# Altium PCB PCB_VHDCI_breakout.PCBDOC (part 2 of 3)
Units mil, origin at the board's own origin, x right, y up, seen from the top; angles counter-clockwise.
Board outline 6299 x 3937 mil, 4 copper layers (TopLayer, Internal Plane 1, Internal Plane 2, BottomLayer), stack 35.551 mil thick; 61 components, 167 nets, 639 pads, 297 vias.
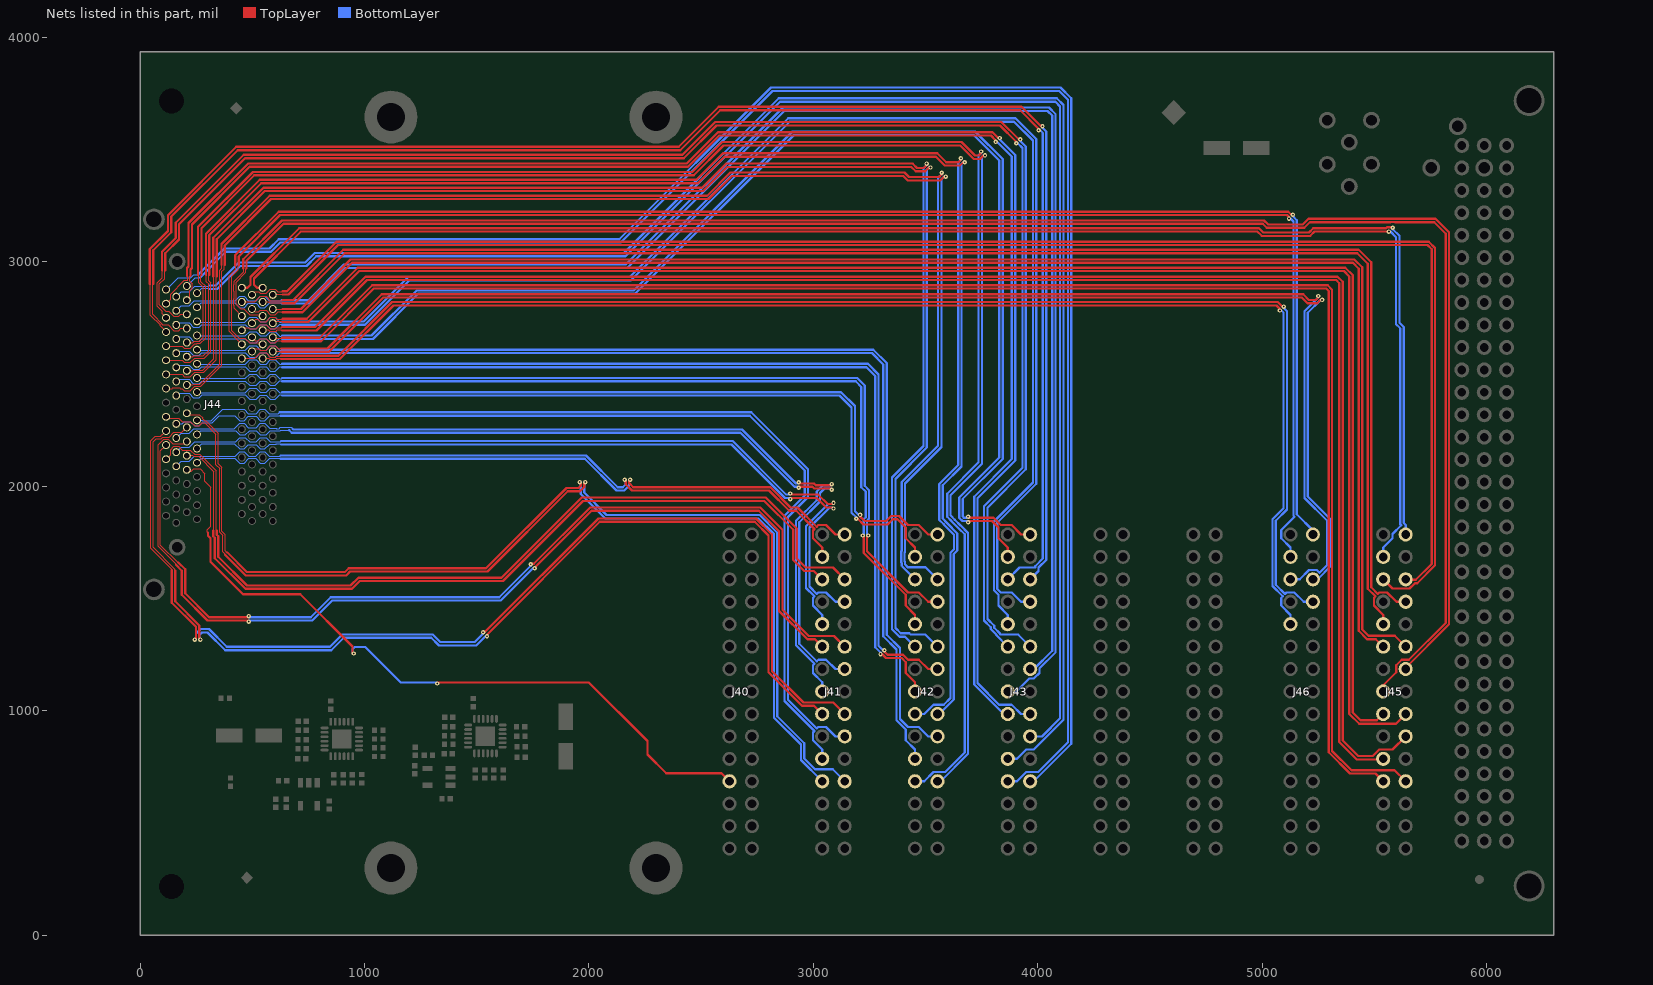
[diagram p4: the nets of this part, all layers, seen from the top]

## Via types
v1: diameter 19.68, hole 7.87, TopLayer to BottomLayer, tented both sides, 274 vias
v2: diameter 23.62, hole 11.81, TopLayer to BottomLayer, tented both sides, 23 vias

## Nets (pads, with @x,y where several pads share a name; then routed paths per layer and width w, separated by ;. In a path a pad name is that pad's centre, name@x,y a point inside that pad or via, vN(x,y) a via of type N, cw(c..) or ccw(c..) an arc to the next point about the centre after c; other vN are vias at no path point) (continued)
LVDS1_8_P: J40.23 J44.L8 | length 3326
  TopLayer w5: J44.L8@208.46,2073.66 214.74,2067.38 229.15,2067.38 239.15,2077.38 268.32,2077.38 288.95,2056.75 288.95,2023.05 315.02,1996.98 315.02,1822.29 300.02,1807.29 300.02,1796.05 302.52,1793.55
  TopLayer w10: 302.52,1793.55 302.52,1780.05 314.02,1768.55 314.02,1664.05 459.02,1519.05 714.45,1519.05 947.02,1286.48 947.02,1259.9 v1(951.87,1255.05) ; v1(1324.02,1121.21) 1328.87,1126.05 2000.02,1126.05 2261.02,865.05 2261.02,804.84 2344.81,721.05 2591.19,721.05 J40.23@2626.57,685.67
  BottomLayer w10: v1(951.87,1255.05) 947.02,1259.9 947.02,1274.05 957.02,1284.05 1004.02,1284.05 1162.02,1126.05 1319.18,1126.05 v1(1324.02,1121.21)
LVDS2_1_N: J41.3 J44.L43 | length 3231.9
  TopLayer w10: v1(2159.18,2029.05) 2164.02,2024.21 2164.02,2008.84 2191.81,1981.05 2802.81,1981.05 2892.81,1891.05 2923.96,1891.05 3005.31,1809.71 2998.46,1802.86 2998.46,1768.48 3039.96,1726.99 J41.3@3039.96,1685.67
  BottomLayer w5: J44.L43@161.21,2089.41 183.24,2111.44 218.9,2111.44 241.52,2134.05 423.35,2134.05 443.29,2154 464.18,2154 484.12,2134.05 515.87,2134.05 535.81,2154 556.7,2154 576.64,2134.05 591.02,2134.05 592.02,2135.06 624.02,2135.06 626.52,2137.56
  BottomLayer w10: 626.52,2137.56 1987.52,2137.56 2129.02,1996.05 2151.02,1996.05 2164.02,2009.05 2164.02,2024.21 v1(2159.18,2029.05)
LVDS2_1_P: J41.2 J44.L9 | length 3142
  TopLayer w10: v1(2183.87,2029.05) 2179.02,2024.21 2179.02,2015.05 2198.02,1996.05 2809.02,1996.05 2899.02,1906.05 2930.18,1906.05 3015.92,1820.32 3022.77,1827.17 3057.14,1827.17 3098.64,1785.67 J41.2@3139.96,1785.67
  BottomLayer w5: J44.L9@253.73,2105.16 272.63,2124.05 422.8,2124.05 443.29,2103.56 464.18,2103.56 484.67,2124.05 515.31,2124.05 535.81,2103.56 556.7,2103.56 577.19,2124.05 595.16,2124.05 596.17,2125.06 624.02,2125.06 626.52,2122.56
  BottomLayer w10: 626.52,2122.56 1981.31,2122.56 2122.81,1981.05 2157.24,1981.05 2179.02,2002.84 2179.02,2024.21 v1(2183.87,2029.05)
LVDS2_2_N: J41.6 J44.L44 | length 3928.2
  TopLayer w5: J44.L44@115.94,2120.9 136,2140.96 136,2162.85 150.77,2177.62 171.66,2177.62 187.41,2161.87 224.35,2161.87 243.29,2142.93 265.76,2142.93 339.02,2069.67 339.02,1804.05 341.52,1801.55
  TopLayer w10: 341.52,1801.55 341.52,1784.05 348.02,1777.55 348.02,1686.22 476.19,1558.05 938.02,1558.05 973.02,1593.05 1610.81,1593.05 1967.81,1950.05 2788.24,1950.05 2926.02,1812.27 2926.02,1678.05 2966.02,1638.05 3087.57,1638.05 J41.6@3139.96,1585.67
LVDS2_2_P: J41.5 J44.L10 | length 3690.6
  TopLayer w5: J44.L10@208.46,2136.65 210.86,2139.05 233.02,2139.05 239.15,2132.93 261.62,2132.93 329.02,2065.53 329.02,1804.05 326.52,1801.55
  TopLayer w10: 326.52,1801.55 326.52,1777.84 333.02,1771.34 333.02,1680 469.97,1543.05 944.24,1543.05 979.24,1578.05 1617.02,1578.05 1974.02,1935.05 2782.02,1935.05 2911.02,1806.05 2911.02,1671.84 2959.81,1623.05 3002.57,1623.05 J41.5@3039.96,1585.67
LVDS2_3_N: J41.9 J44.L45 | length 3740.2
  TopLayer w10: v1(2897.02,1967.9) 2897.02,1967.05 2901.02,1963.05 3022.24,1963.05 3064.24,1921.05 3085.18,1921.05 v1(3090.02,1925.9)
  BottomLayer w5: J44.L45@161.21,2152.4 183.24,2174.43 218.9,2174.43 243.53,2199.05 425.35,2199.05 443.29,2216.99 469.63,2216.99 488.56,2198.05 516.87,2198.05 535.81,2216.99 562.15,2216.99 581.08,2198.05 601.97,2198.05 602.98,2199.05 626.02,2199.05 628.52,2201.55
  BottomLayer w10: 628.52,2201.55 2641.52,2201.55 2880.02,1963.05 2892.18,1963.05 v1(2897.02,1967.9) ; J41.9@3039.96,1385.67 3039.96,1426.99 2998.46,1468.48 2998.46,1502.86 3005.31,1509.71 2968.1,1546.92 2968.1,1822.35 3066.81,1921.05 3085.18,1921.05 v1(3090.02,1925.9)
LVDS2_3_P: J41.8 J44.L11 | length 3602.7
  TopLayer w10: v1(2897.02,1943.21) 2897.02,1944.05 2901.02,1948.05 3016.02,1948.05 3058.02,1906.05 3085.18,1906.05 v1(3090.02,1901.21)
  BottomLayer w5: J44.L11@253.73,2168.15 274.64,2189.05 420.79,2189.05 443.29,2166.55 464.18,2166.55 483.11,2185.49 516.87,2185.49 535.81,2166.55 556.7,2166.55 578.19,2188.05 606.11,2188.05 607.12,2189.05 626.02,2189.05 628.52,2186.55
  BottomLayer w10: 628.52,2186.55 2635.31,2186.55 2873.81,1948.05 2892.18,1948.05 v1(2897.02,1943.21) ; v1(3090.02,1901.21) 3085.18,1906.05 3073.02,1906.05 2983.1,1816.13 2983.1,1553.13 3015.92,1520.32 3022.77,1527.17 3057.14,1527.17 3098.64,1485.67 J41.8@3139.96,1485.67
LVDS2_4_N: J41.12 J44.L46 | length 4378.3
  TopLayer w5: J44.L46@115.94,2183.9 91.02,2158.98 91.02,2131.65 90.72,2131.35 90.72,2110.46 91.02,2110.16 91.02,2107.05 90.72,2106.75 90.72,1737.36 167.02,1661.05 170.56,1661.05
  TopLayer w10: 170.56,1661.05 201.02,1630.59 201.02,1523.05 307.02,1417.05 479.18,1417.05 v1(484.02,1421.9) ; v1(1740.6,1652.48) 1742.99,1654.87 1754.62,1654.87 2005.81,1906.05 2763.22,1906.05 2862.83,1806.45 2862.83,1450.25 2980.02,1333.05 3092.57,1333.05 J41.12@3139.96,1285.67
  BottomLayer w10: v1(484.02,1421.9) 488.87,1417.05 760.81,1417.05 849.81,1506.05 1601.02,1506.05 1740.6,1645.63 v1(1740.6,1652.48)
LVDS2_4_P: J41.11 J44.L12 | length 4429.5
  TopLayer w5: 159.95,1650.45 159.95,1653.98 80.72,1733.22 80.72,2184.34 105.49,2209.11 126.38,2209.11 145.32,2190.18 198.99,2190.18 J44.L12@208.46,2199.65
  TopLayer w10: 159.95,1650.45 186.02,1624.38 186.02,1516.84 300.81,1402.05 479.18,1402.05 v1(484.02,1397.21) ; v1(1758.05,1635.02) 1758.05,1637.09 2012.02,1891.05 2757.01,1891.05 2847.83,1800.24 2847.83,1444.04 2973.81,1318.05 3007.57,1318.05 J41.11@3039.96,1285.67
  BottomLayer w10: v1(484.02,1397.21) 488.87,1402.05 767.02,1402.05 856.02,1491.05 1607.24,1491.05 1751.21,1635.02 v1(1758.05,1635.02)
LVDS2_5_N: J41.15 J44.L47 | length 4151.6
  TopLayer w10: v1(2935.02,2017.9) 2939.87,2013.05 3003.02,2013.05 3011.02,2005.05 3077.18,2005.05 v1(3082.02,2009.9)
  BottomLayer w5: J44.L47@161.21,2215.39 183.24,2237.42 218.9,2237.42 238.54,2257.05 420.36,2257.05 443.29,2279.98 464.18,2279.98 483.11,2261.04 516.87,2261.04 535.81,2279.98 556.7,2279.98 578.19,2258.48 606.11,2258.48 607.54,2257.05 619.88,2257.05 625.38,2262.55 673.74,2262.55 679.17,2257.13
  BottomLayer w10: 679.17,2257.13 682.63,2253.66 2682.42,2253.66 2923.02,2013.05 2930.18,2013.05 v1(2935.02,2017.9) ; J41.15@3039.96,1085.67 3039.96,1126.99 2998.46,1168.48 2998.46,1202.86 3005.31,1209.71 2923.02,1292 2923.02,1846.27 3015.02,1938.27 3015.02,1976.48 3043.6,2005.05 3077.18,2005.05 v1(3082.02,2009.9)
LVDS2_5_P: J41.14 J44.L13 | length 4007.8
  TopLayer w10: v1(2935.02,1993.21) 2939.87,1998.05 2996.81,1998.05 3004.81,1990.05 3077.18,1990.05 v1(3082.02,1985.21)
  BottomLayer w5: J44.L13@253.73,2231.14 269.65,2247.05 425.78,2247.05 443.29,2229.55 469.63,2229.55 488.56,2248.48 516.87,2248.48 535.81,2229.55 562.15,2229.55 581.08,2248.48 601.97,2248.48 603.4,2247.05 624.02,2247.05 627.02,2250.05 665.02,2250.05
  BottomLayer w10: 665.02,2250.05 676.42,2238.66 2676.2,2238.66 2916.81,1998.05 2930.18,1998.05 v1(2935.02,1993.21) ; v1(3082.02,1985.21) 3077.18,1990.05 3049.81,1990.05 3030.02,1970.27 3030.02,1932.05 2938.02,1840.05 2938.02,1298.21 3015.92,1220.32 3022.77,1227.17 3057.14,1227.17 3098.64,1185.67 J41.14@3139.96,1185.67
LVDS2_6_N: J41.18 J44.L48 | length 5006.9
  TopLayer w5: J44.L48@115.94,2246.89 98.16,2229.11 97.21,2229.11 91.15,2223.05 67.88,2223.05 48.02,2203.2 48.02,1723.91 143.88,1628.05 141.38,1625.55
  TopLayer w10: 141.38,1625.55 141.38,1481.48 249.02,1373.84 249.02,1321.9 v1(244.18,1317.05) ; v1(1528.49,1349.59) 1535.34,1349.59 2042.81,1857.05 2745.28,1857.05 2815.57,1786.76 2815.57,1177.51 2956.02,1037.05 3088.57,1037.05 J41.18@3139.96,985.67
  BottomLayer w10: v1(244.18,1317.05) 249.02,1321.9 249.02,1343.27 269.81,1364.05 307.24,1364.05 386.24,1285.05 846.24,1285.05 901.24,1340.05 1304.24,1340.05 1338.24,1306.05 1491.81,1306.05 1528.49,1342.74 v1(1528.49,1349.59)
LVDS2_6_P: J41.17 J44.L14 | length 4962.5
  TopLayer w5: 156.38,1624.55 153.88,1627.05 153.88,1632.2 150.95,1635.13 58.02,1728.05 58.02,2199.05 72.02,2213.05 95.29,2213.05 101.35,2219.11 129.27,2219.11 150.77,2240.61 186.43,2240.61 J44.L14@208.46,2262.64
  TopLayer w10: 156.38,1624.55 156.38,1487.7 264.02,1380.05 264.02,1321.9 v1(268.87,1317.05) ; v1(1545.95,1332.13) 1545.95,1338.98 2049.02,1842.05 2739.06,1842.05 2800.57,1780.55 2800.57,1171.3 2949.81,1022.05 3003.57,1022.05 J41.17@3039.96,985.67
  BottomLayer w10: v1(268.87,1317.05) 264.02,1321.9 264.02,1337.05 276.02,1349.05 301.02,1349.05 380.02,1270.05 852.45,1270.05 907.45,1325.05 1298.02,1325.05 1327.63,1295.45 1332.02,1291.05 1498.02,1291.05 1539.1,1332.13 v1(1545.95,1332.13)
LVDS2_7_N: J41.21 J44.L49 | length 4363.1
  BottomLayer w5: J44.L49@161.21,2278.39 188.54,2278.39 198.01,2287.85 224.35,2287.85 243.29,2268.92 264.18,2268.92 277.8,2282.54 321.65,2282.54 324.58,2285.47 352.59,2313.48 422.34,2313.48 443.29,2292.54 464.18,2292.54 483.11,2311.48 516.87,2311.48 535.81,2292.54 556.7,2292.54 577.64,2313.48 624.42,2313.48 625.99,2315.05
  BottomLayer w10: 625.99,2315.05 2717.02,2315.05 2962.02,2070.05 2962.02,1959.11 2872.02,1869.11 2872.02,1043 3005.31,909.71 2998.46,902.86 2998.46,868.48 3039.96,826.99 J41.21@3039.96,785.67
LVDS2_7_P: J41.20 J44.L15 | length 4267.1
  BottomLayer w5: J44.L15@253.73,2294.13 275.25,2294.13 276.85,2292.54 317.51,2292.54 367.94,2342.97 464.18,2342.97 483.11,2324.03 516.87,2324.03 535.81,2342.97 556.7,2342.97 576.19,2323.48 615.56,2323.48 622.13,2330.05
  BottomLayer w10: 622.13,2330.05 2723.24,2330.05 2977.02,2076.27 2977.02,1952.9 2887.02,1862.9 2887.02,1049.21 3015.92,920.32 3022.77,927.17 3057.14,927.17 3098.64,885.67 J41.20@3139.96,885.67
LVDS2_8_N: J41.24 J44.L50 | length 4910.4
  TopLayer w5: J44.L50@115.94,2309.88 122.22,2303.6 171.66,2303.6 187.41,2287.85 224.35,2287.85 243.29,2268.92 264.18,2268.92 277.8,2282.54 287.8,2282.54 338.02,2232.31 338.02,2097.05 355.02,2080.05 355.02,1795.91 368.95,1781.98 368.95,1707.73 378.12,1698.57 378.12,1695.03
  TopLayer w10: 378.12,1695.03 470.49,1602.66 918.63,1602.66 936.02,1620.05 1548.24,1620.05 1906.24,1978.05 1960.24,1978.05 1979.02,1996.84 1979.02,2014.21 v1(1983.87,2019.05)
  BottomLayer w10: v1(1983.87,2019.05) 1980.02,2019.05 1979.02,2018.05 1979.02,1972.05 2079.02,1872.05 2761.24,1872.05 2840.02,1793.27 2840.02,975.46 2960.21,855.27 2960.21,786.63 3007.67,739.17 3086.45,739.17 J41.24@3139.96,685.67
LVDS2_8_P: J41.23 J44.L16 | length 4700.6
  TopLayer w5: J44.L16@208.46,2325.63 214.74,2319.35 264.18,2319.35 278.95,2304.58 278.95,2301.39 287.8,2292.54 291.94,2292.54 348.02,2236.46 348.02,2101.2 365.02,2084.2 365.02,1800.05 376.02,1789.05 378.95,1786.13 378.95,1711.87 385.19,1705.64 388.72,1705.64
  TopLayer w10: 388.72,1705.64 476.7,1617.66 912.42,1617.66 929.81,1635.05 1542.02,1635.05 1900.02,1993.05 1954.02,1993.05 1964.02,2003.05 1964.02,2014.21 v1(1959.18,2019.05)
  BottomLayer w10: v1(1959.18,2019.05) 1963.02,2019.05 1964.02,2018.05 1964.02,1965.84 2072.81,1857.05 2755.02,1857.05 2825.02,1787.05 2825.02,969.24 2945.21,849.05 2945.21,786.24 2945.02,786.05 2945.02,780.6 J41.23@3039.96,685.67
LVDS3_1_N: J42.3 J44.L53 | length 3990.4
  TopLayer w10: v1(3191.3,1855.33) 3198.14,1855.33 3223.42,1830.05 3331.02,1830.05 3354.02,1853.05 3375.35,1853.05 3411.85,1816.56 3411.85,1768.48 3453.34,1726.99 J42.3@3453.34,1685.67
  BottomLayer w5: J44.L53@161.21,2404.37 170.68,2413.84 218.9,2413.84 237.84,2394.9 264.18,2394.9 276.67,2407.4 419.35,2407.4 419.5,2407.24 468.35,2407.24 488.56,2387.03 516.87,2387.03 535.81,2405.96 562.15,2405.96 581.08,2387.03 601.97,2387.03 622.19,2407.24 630.02,2407.24 632.52,2404.74
  BottomLayer w10: 632.52,2404.74 3117.33,2404.74 3170.83,2351.25 3170.83,1882.64 3191.3,1862.18 v1(3191.3,1855.33)
LVDS3_1_P: J42.2 J44.L19 | length 3894.5
  TopLayer w10: v1(3208.75,1872.78) 3208.75,1865.93 3229.63,1845.05 3324.81,1845.05 3347.81,1868.05 3381.56,1868.05 3422.45,1827.17 3470.53,1827.17 3512.03,1785.67 J42.2@3553.34,1785.67
  BottomLayer w5: J44.L19@253.73,2420.12 256.45,2417.4 423.49,2417.4 423.64,2417.24 468.35,2417.24 488.56,2437.46 516.87,2437.46 535.81,2418.52 562.15,2418.52 581.08,2437.46 601.97,2437.46 622.19,2417.24 630.02,2417.24 632.52,2419.74
  BottomLayer w10: 632.52,2419.74 3123.55,2419.74 3185.83,2357.46 3185.83,1888.86 3201.9,1872.78 v1(3208.75,1872.78)
LVDS3_2_N: J42.6 J44.L54 | length 6178.8
  TopLayer w5: J44.L54@115.94,2435.87 142.9,2435.87 146.63,2439.59 175.8,2439.59 179.52,2435.87 188.54,2435.87 198.01,2426.4 224.35,2426.4 243.29,2445.33 270.16,2445.33 365.02,2540.2 365.02,2958.05 375.02,2968.05 375.02,2985.05 377.52,2987.55
  TopLayer w10: 377.52,2987.55 377.52,3073.55 584.02,3280.05 2533.24,3280.05 2636.24,3383.05 3400.81,3383.05 3420.7,3363.16 3566.13,3363.16 3583.1,3380.13 v1(3589.95,3380.13)
  BottomLayer w10: J42.6@3553.34,1585.67 3499.84,1639.17 3421.05,1639.17 3416.6,1643.63 3416.6,1644.69 3408.83,1652.46 3408.83,1664.43 3406.85,1666.41 3406.85,1704.93 3408.83,1706.91 3408.83,2012.86 3571.13,2175.16 3571.13,3368.16 3583.1,3380.13 v1(3589.95,3380.13)
LVDS3_2_P: J42.5 J44.L20 | length 6000.6
  TopLayer w5: J44.L20@208.46,2451.61 235.42,2451.61 239.15,2455.33 266.02,2455.33 355.02,2544.34 355.02,2962.2 365.02,2972.2 365.02,2985.05 362.52,2987.55
  TopLayer w10: 362.52,2987.55 362.52,3079.77 577.81,3295.05 2527.02,3295.05 2630.02,3398.05 3407.02,3398.05 3426.92,3378.16 3559.92,3378.16 3572.49,3390.74 v1(3572.49,3397.59)
  BottomLayer w10: J42.5@3453.34,1585.67 3399.02,1639.99 3399.02,1641.05 3393.02,1647.05 3393.02,1650.05 3393.83,1650.86 3393.83,1658.22 3391.85,1660.2 3391.85,1711.14 3393.83,1713.12 3393.83,2019.07 3556.13,2181.37 3556.13,3374.37 3572.49,3390.74 v1(3572.49,3397.59)
LVDS3_3_N: J42.9 J44.L55 | length 4281
  TopLayer w10: v1(3220.18,1781.05) 3222.02,1781.05 3225.02,1778.05 3225.02,1703.38 3411.85,1516.56 3411.85,1468.48 3453.34,1426.99 J42.9@3453.34,1385.67
  BottomLayer w5: J44.L55@161.21,2467.36 170.68,2476.83 218.9,2476.83 237.84,2457.89 264.18,2457.89 275.24,2468.96 469.63,2468.96 488.56,2450.02 516.87,2450.02 535.81,2468.96 562.15,2468.96 581.08,2450.02 601.97,2450.02 622.19,2470.24 631.02,2470.24 633.52,2467.74
  BottomLayer w10: 633.52,2467.74 3189.34,2467.74 3214.02,2443.05 3214.02,1996.05 3233.59,1976.48 3233.59,1862.49 3225.02,1853.92 3225.02,1785.9 v1(3220.18,1781.05)
LVDS3_3_P: J42.8 J44.L21 | length 4185.2
  TopLayer w10: v1(3244.87,1781.05) 3243.02,1781.05 3240.02,1778.05 3240.02,1709.59 3422.45,1527.17 3470.53,1527.17 3512.03,1485.67 J42.8@3553.34,1485.67
  BottomLayer w5: J44.L21@253.73,2483.11 255.33,2481.52 469.63,2481.52 488.56,2500.45 516.87,2500.45 535.81,2481.52 562.15,2481.52 581.08,2500.45 601.97,2500.45 622.19,2480.24 631.02,2480.24 633.52,2482.74
  BottomLayer w10: 633.52,2482.74 3195.56,2482.74 3229.02,2449.27 3229.02,2002.27 3248.59,1982.7 3248.59,1856.28 3240.02,1847.71 3240.02,1785.9 v1(3244.87,1781.05)
LVDS3_4_N: J42.12 J44.L56 | length 6470
  TopLayer w5: J44.L56@115.94,2498.86 188.54,2498.86 198.01,2489.39 224.35,2489.39 243.29,2508.33 283.44,2508.33 339.02,2563.91 339.02,2934.05 341.52,2936.55
  TopLayer w10: 341.52,2936.55 341.52,3101.55 556.02,3316.05 2510.24,3316.05 2617.24,3423.05 3436.81,3423.05 3456.2,3403.66 3498.63,3403.66 3515.6,3420.63 v1(3522.45,3420.63)
  BottomLayer w10: v1(3522.45,3420.63) 3520.02,3423.05 3518.02,3423.05 3506.02,3411.05 3506.02,2173.05 3366.02,2033.05 3366.02,1369.05 3390.02,1345.05 3428.2,1345.05 3434.08,1339.17 3499.84,1339.17 J42.12@3553.34,1285.67
LVDS3_4_P: J42.11 J44.L22 | length 6294.1
  TopLayer w5: J44.L22@208.46,2514.61 235.42,2514.61 239.15,2518.33 279.3,2518.33 329.02,2568.05 329.02,2934.05 326.52,2936.55
  TopLayer w10: 326.52,2936.55 326.52,3107.77 549.81,3331.05 2504.02,3331.05 2611.02,3438.05 3443.02,3438.05 3462.42,3418.66 3492.42,3418.66 3504.99,3431.24 v1(3504.99,3438.09)
  BottomLayer w10: J42.11@3453.34,1285.67 3408.96,1330.05 3383.81,1330.05 3351.02,1362.84 3351.02,2039.27 3491.02,2179.27 3491.02,3417.27 3507.42,3433.66 3507.42,3435.66 v1(3504.99,3438.09)
LVDS3_5_N: J42.15 J44.L57 | length 4705.5
  TopLayer w10: v1(3299.49,1252.52) 3306.34,1252.52 3324.27,1234.59 3393.81,1234.59 3411.85,1216.56 3411.85,1168.48 3453.34,1126.99 J42.15@3453.34,1085.67
  BottomLayer w5: J44.L57@161.21,2530.35 170.68,2539.82 218.9,2539.82 237.84,2520.89 264.18,2520.89 275.24,2531.95 469.63,2531.95 488.56,2513.01 516.87,2513.01 535.81,2531.95 562.15,2531.95 581.08,2513.01 601.97,2513.01 622.19,2533.23 631.02,2533.23 633.52,2530.73
  BottomLayer w10: 633.52,2530.73 3237.35,2530.73 3276.02,2492.05 3276.02,1282.84 3300.42,1258.45 3300.42,1253.45 v1(3299.49,1252.52)
LVDS3_5_P: J42.14 J44.L23 | length 4609.7
  TopLayer w10: v1(3316.95,1269.98) 3316.95,1263.13 3330.48,1249.59 3400.02,1249.59 3422.45,1227.17 3470.53,1227.17 3512.03,1185.67 J42.14@3553.34,1185.67
  BottomLayer w5: J44.L23@253.73,2546.1 255.33,2544.51 469.63,2544.51 488.56,2563.44 516.87,2563.44 535.81,2544.51 562.15,2544.51 581.08,2563.44 601.97,2563.44 622.19,2543.23 631.02,2543.23 633.52,2545.73
  BottomLayer w10: 633.52,2545.73 3243.56,2545.73 3291.02,2498.27 3291.02,1289.05 3311.02,1269.05 3316.02,1269.05 v1(3316.95,1269.98)
LVDS3_6_N: J42.18 J44.L58 | length 6855.5
  TopLayer w5: J44.L58@115.94,2561.85 188.54,2561.85 198.01,2552.38 224.35,2552.38 243.29,2571.32 286.43,2571.32 315.02,2599.91 315.02,2907.2 306.02,2916.2 306.02,2939.05 308.52,2941.55
  TopLayer w10: 308.52,2941.55 308.52,3119.55 540.02,3351.05 2486.24,3351.05 2604.24,3469.05 3546.81,3469.05 3586.7,3429.16 3653.13,3429.16 3668.6,3444.63 v1(3675.45,3444.63)
  BottomLayer w10: J42.18@3553.34,985.67 3561.64,985.67 3626.42,1050.45 3626.42,1698.23 3642.02,1713.84 3642.02,1790.06 3596.02,1836.06 3596.02,1836.77 3576.63,1856.16 3576.63,2004.45 3661.02,2088.84 3661.02,3437.05 3670.02,3446.05 3674.02,3446.05 v1(3675.45,3444.63)
LVDS3_6_P: J42.17 J44.L24 | length 6842.4
  TopLayer w5: J44.L24@208.46,2577.6 235.42,2577.6 239.15,2581.32 282.29,2581.32 305.02,2604.05 305.02,2903.05 296.02,2912.05 296.02,2939.05 293.52,2941.55
  TopLayer w10: 293.52,2941.55 293.52,3125.77 533.81,3366.05 2480.02,3366.05 2598.02,3484.05 3553.02,3484.05 3592.92,3444.16 3646.92,3444.16 3657.99,3455.24 v1(3657.99,3462.09)
  BottomLayer w10: J42.17@3453.34,985.67 3494.66,985.67 3536.15,1027.17 3581.92,1027.17 3611.42,1056.66 3611.42,1704.45 3627.02,1720.05 3627.02,1783.85 3581.02,1829.85 3581.02,1830.56 3561.63,1849.95 3561.63,2010.66 3646.02,2095.05 3646.02,3443.27 3659.42,3456.66 3659.42,3460.66 v1(3657.99,3462.09)
LVDS3_7_N: J42.21 J44.L59 | length 5037
  BottomLayer w5: J44.L59@161.21,2593.35 170.68,2602.81 218.9,2602.81 237.84,2583.88 264.18,2583.88 275.24,2594.94 469.63,2594.94 488.56,2576 516.87,2576 535.81,2594.94 562.15,2594.94 581.08,2576 601.97,2576 622.19,2596.22 630.02,2596.22 632.52,2593.72
  BottomLayer w10: 632.52,2593.72 3261.36,2593.72 3312.02,2543.05 3312.02,1332.05 3371.02,1273.05 3371.02,957.38 3411.85,916.56 3411.85,868.48 3453.34,826.99 J42.21@3453.34,785.67
LVDS3_7_P: J42.20 J44.L25 | length 4941.2
  BottomLayer w5: J44.L25@253.73,2609.09 255.33,2607.5 469.63,2607.5 488.56,2626.44 516.87,2626.44 535.81,2607.5 562.15,2607.5 581.08,2626.44 601.97,2626.44 622.19,2606.22 630.02,2606.22 632.52,2608.72
  BottomLayer w10: 632.52,2608.72 3267.57,2608.72 3327.02,2549.27 3327.02,1338.27 3386.02,1279.27 3386.02,963.59 3422.45,927.17 3470.53,927.17 3512.03,885.67 J42.20@3553.34,885.67
LVDS3_8_N: J42.24 J44.L60 | length 7330
  TopLayer w5: J44.L60@115.94,2624.84 188.54,2624.84 198.01,2615.37 224.35,2615.37 243.29,2634.31 251.62,2634.31 254.18,2636.87 268.32,2636.87 292.02,2660.57 292.02,2891.2 271.02,2912.2 271.02,2939.05 273.52,2941.55
  TopLayer w10: 273.52,2941.55 273.52,3150.55 509.02,3386.05 2467.24,3386.05 2600.24,3519.05 3654.81,3519.05 3714.7,3459.16 3743.13,3459.16 3758.6,3474.63 v1(3765.45,3474.63)
  BottomLayer w10: J42.24@3553.34,685.67 3567.64,685.67 3690.02,808.05 3690.02,1792.27 3657.24,1825.05 3656.53,1825.05 3631.02,1850.56 3631.02,1851.27 3611.63,1870.66 3611.63,1960.66 3751.52,2100.55 3751.52,3467.55 3760.02,3476.05 3764.02,3476.05 v1(3765.45,3474.63)
LVDS3_8_P: J42.23 J44.L26 | length 7316.9
  TopLayer w5: J44.L26@208.46,2640.59 235.42,2640.59 241.7,2646.87 264.18,2646.87 282.02,2664.72 282.02,2887.05 261.02,2908.05 261.02,2939.05 258.52,2941.55 ; 558.35,3401.05 561.88,3401.05
  TopLayer w10: 258.52,2941.55 258.52,3156.77 502.81,3401.05 558.35,3401.05 ; 561.88,3401.05 2461.02,3401.05 2594.02,3534.05 3661.02,3534.05 3720.92,3474.16 3736.92,3474.16 3747.99,3485.24 v1(3747.99,3492.09)
  BottomLayer w10: J42.23@3453.34,685.67 3494.66,685.67 3536.15,727.17 3587.92,727.17 3675.02,814.27 3675.02,1786.05 3651.02,1810.05 3650.31,1810.05 3616.02,1844.34 3616.02,1845.05 3596.63,1864.45 3596.63,1966.87 3736.52,2106.77 3736.52,3473.77 3749.42,3486.66 3749.42,3490.66 v1(3747.99,3492.09)
LVDS4_1_N: J43.3 J44.L61 | length 6151.7
  TopLayer w10: v1(3690.02,1840.21) 3694.87,1845.05 3796.74,1845.05 3825.23,1816.56 3825.23,1768.48 3866.73,1726.99 J43.3@3866.73,1685.67
  BottomLayer w5: J44.L61@161.21,2656.34 170.68,2665.81 218.9,2665.81 237.84,2646.87 264.18,2646.87 275.24,2657.93 469.63,2657.93 488.56,2639 516.87,2639 535.81,2657.93 562.15,2657.93 581.08,2639 601.97,2639 622.19,2659.21 630.02,2659.21 632.52,2656.71
  BottomLayer w10: 632.52,2656.71 1037.68,2656.71 1239.02,2858.05 2206.02,2858.05 2914.02,3566.05 3715.02,3566.05 3829.02,3452.05 3829.02,2128.27 3651.02,1950.27 3651.02,1858.84 3664.81,1845.05 3685.18,1845.05 v1(3690.02,1840.21)
LVDS4_1_P: J43.2 J44.L27 | length 6056
  TopLayer w10: v1(3690.02,1864.9) 3694.87,1860.05 3802.95,1860.05 3835.84,1827.17 3883.92,1827.17 3925.41,1785.67 J43.2@3966.73,1785.67
  BottomLayer w5: J44.L27@253.73,2672.09 255.33,2670.49 469.63,2670.49 488.56,2689.43 516.87,2689.43 535.81,2670.49 562.15,2670.49 581.08,2689.43 601.97,2689.43 622.19,2669.21 630.02,2669.21 632.52,2671.71
  BottomLayer w10: 632.52,2671.71 1031.47,2671.71 1232.81,2873.05 2199.81,2873.05 2907.81,3581.05 3721.24,3581.05 3844.02,3458.27 3844.02,2122.05 3666.02,1944.05 3666.02,1865.05 3671.02,1860.05 3685.18,1860.05 v1(3690.02,1864.9)
LVDS4_2_N: J43.6 J44.L62 | length 6772.2
  TopLayer w5: 43.75,2901.55 46.25,2899.05 46.25,2761.83 89.02,2719.05 89.02,2714.75 J44.L62@115.94,2687.83
  TopLayer w10: 43.75,2901.55 43.75,3057.78 124.02,3138.05 124.02,3208.27 428.81,3513.05 2401.02,3513.05 2579.02,3691.05 3928.24,3691.05 4014.71,3604.59 v1(4021.55,3604.59)
  BottomLayer w10: J43.6@3966.73,1585.67 4004.02,1622.97 4004.02,1638.05 4038.02,1672.05 4038.02,3581.27 4021.55,3597.74 v1(4021.55,3604.59)
LVDS4_2_P: J43.5 J44.L28 | length 6880
  TopLayer w5: 58.75,2901.55 56.25,2899.05 56.25,2765.97 99.02,2723.2 99.02,2719.05 125.83,2719.05 150.77,2694.11 171.66,2694.11 181.13,2703.58 J44.L28@208.46,2703.58
  TopLayer w10: 58.75,2901.55 58.75,3051.57 139.02,3131.84 139.02,3202.05 435.02,3498.05 2407.24,3498.05 2585.24,3676.05 3922.02,3676.05 4004.1,3593.98 v1(4004.1,3587.13)
  BottomLayer w10: J43.5@3866.73,1585.67 3919.11,1638.05 3989.02,1638.05 3989.02,1644.27 4023.02,1678.27 4023.02,3575.05 4010.95,3587.13 v1(4004.1,3587.13)
LVDS4_3_N: J43.9 J44.L63 | length 6529.7
  BottomLayer w5: J44.L63@161.21,2719.33 170.68,2728.8 218.9,2728.8 237.84,2709.86 264.18,2709.86 275.24,2720.92 469.63,2720.92 488.56,2701.99 516.87,2701.99 535.81,2720.93 562.15,2720.93 581.08,2701.99 601.97,2701.99 622.19,2722.2 630.02,2722.2 632.52,2719.7
  BottomLayer w10: 632.52,2719.7 1002.67,2719.7 1201.02,2918.05 2188.02,2918.05 2895.02,3625.05 3895.02,3625.05 3979.02,3541.05 3979.02,2017.27 3805.23,1843.48 3805.23,1536.56 3825.23,1516.56 3825.23,1468.48 3866.73,1426.99 J43.9@3866.73,1385.67
LVDS4_3_P: J43.8 J44.L29 | length 6436.1
  BottomLayer w5: J44.L29@253.73,2735.08 257.89,2730.92 467.07,2730.92 488.56,2752.42 516.87,2752.42 535.81,2733.48 562.15,2733.48 581.08,2752.42 601.97,2752.42 622.19,2732.2 630.02,2732.2 632.52,2734.7
  BottomLayer w10: 632.52,2734.7 996.46,2734.7 1194.81,2933.05 2181.81,2933.05 2888.81,3640.05 3901.24,3640.05 3994.02,3547.27 3994.02,2011.05 3820.23,1837.26 3820.23,1542.77 3835.84,1527.17 3883.92,1527.17 3925.41,1485.67 J43.8@3966.73,1485.67
LVDS4_4_N: J43.12 J44.L64 | length 6924
  TopLayer w5: 97.52,2961.55 100.02,2959.05 100.02,2930.2 76.02,2906.2 76.02,2802.05 98.02,2780.05 98.02,2768.74 J44.L64@115.94,2750.83
  TopLayer w10: 97.52,2961.55 97.52,3044.77 159.02,3106.27 159.02,3174.27 461.81,3477.05 2417.02,3477.05 2563.02,3623.05 3838.24,3623.05 3915.21,3546.09 v1(3922.05,3546.09)
  BottomLayer w10: v1(3922.05,3546.09) 3922.05,3539.24 3947.02,3514.27 3947.02,2076.05 3776.02,1905.05 3776.02,1408.27 3806.02,1378.27 3806.02,1370.27 3831.79,1344.5 3831.79,1341.82 3834.44,1339.17 3913.22,1339.17 J43.12@3966.73,1285.67
LVDS4_4_P: J43.11 J44.L30 | length 6866.6
  TopLayer w5: 112.52,2961.55 110.02,2959.05 110.02,2926.05 86.02,2902.05 86.02,2808.07 114.04,2780.05 127.82,2780.05 150.77,2757.11 171.66,2757.11 181.13,2766.57 J44.L30@208.46,2766.57
  TopLayer w10: 112.52,2961.55 112.52,3038.55 174.02,3100.05 174.02,3168.05 468.02,3462.05 2423.24,3462.05 2569.24,3608.05 3832.02,3608.05 3904.6,3535.48 v1(3904.6,3528.63)
  BottomLayer w10: J43.11@3866.73,1285.67 3815.02,1337.37 3815.02,1340.05 3791.02,1364.05 3791.02,1372.05 3761.02,1402.05 3761.02,1911.27 3932.02,2082.27 3932.02,3508.05 3911.45,3528.63 v1(3904.6,3528.63)
LVDS4_5_N: J43.15 J44.L65 | length 7033.8
  BottomLayer w5: J44.L65@161.21,2782.32 183.24,2804.35 218.9,2804.35 241.61,2827.05 423.43,2827.05 443.29,2846.91 464.18,2846.91 483.11,2827.97 516.87,2827.97 535.81,2846.91 556.7,2846.91 576.55,2827.05 629.02,2827.05 631.52,2829.55
  BottomLayer w10: 631.52,2829.55 750.52,2829.55 909.02,2988.05 2164.81,2988.05 2864.81,3688.05 4050.24,3688.05 4080.02,3658.27 4080.02,1260.84 4008.22,1189.04 4008.22,1168.48 3983.92,1144.17 3963.36,1144.17 3904.85,1085.67 J43.15@3866.73,1085.67
LVDS4_5_P: J43.14 J44.L31 | length 6734.2
  BottomLayer w5: J44.L31@253.73,2798.07 272.72,2817.05 422.71,2817.05 443.29,2796.48 464.18,2796.48 483.11,2815.41 516.87,2815.41 535.81,2796.48 556.7,2796.48 577.28,2817.05 629.02,2817.05 631.52,2814.55
  BottomLayer w10: 631.52,2814.55 756.74,2814.55 915.24,2973.05 2171.02,2973.05 2871.02,3673.05 4044.02,3673.05 4065.02,3652.05 4065.02,1267.05 3983.64,1185.67 J43.14@3966.73,1185.67
LVDS4_6_N: J43.18 J44.L66 | length 7023.3
  TopLayer w5: J44.L66@115.94,2813.82 136,2833.88 136,2855.76 198.01,2917.78 212.02,2917.78 212.02,2936.05 209.52,2938.55
  TopLayer w10: 209.52,2938.55 209.52,2972.77 216.02,2979.27 216.02,3173.27 481.81,3439.05 2436.02,3439.05 2575.02,3578.05 3798.24,3578.05 3824.21,3552.09 v1(3831.05,3552.09)
  BottomLayer w10: v1(3831.05,3552.09) 3831.05,3545.24 3900.02,3476.27 3900.02,2115.05 3732.02,1947.05 3732.02,1123.27 3828.13,1027.17 3883.92,1027.17 3925.41,985.67 J43.18@3966.73,985.67
LVDS4_6_P: J43.17 J44.L32 | length 6843.8
  TopLayer w5: J44.L32@208.46,2829.57 222.02,2843.13 222.02,2870.46 233.67,2882.11 233.67,2903 222.02,2914.65 222.02,2936.05 224.52,2938.55
  TopLayer w10: 224.52,2938.55 224.52,2966.55 231.02,2973.05 231.02,3167.05 488.02,3424.05 2442.24,3424.05 2581.24,3563.05 3792.02,3563.05 3813.6,3541.48 v1(3813.6,3534.63)
  BottomLayer w10: v1(3813.6,3534.63) 3820.45,3534.63 3885.02,3470.05 3885.02,2121.27 3717.02,1953.27 3717.02,1117.05 3848.41,985.67 J43.17@3866.73,985.67
LVDS4_7_N: J43.21 J44.L67 | length 7392.1
  BottomLayer w5: J44.L67@161.21,2845.31 183.24,2867.34 218.9,2867.34 243.61,2892.05 306.02,2892.05 308.52,2894.55
  BottomLayer w10: 308.52,2894.55 337.52,2894.55 440.02,2997.05 736.02,2997.05 779.02,3040.05 2156.81,3040.05 2845.81,3729.05 4085.24,3729.05 4115.02,3699.27 4115.02,959.84 3982.35,827.17 3949.54,827.17 3908.04,785.67 J43.21@3866.73,785.67
LVDS4_7_P: J43.20 J44.L33 | length 7104
  BottomLayer w5: J44.L33@253.73,2861.06 274.72,2882.05 306.02,2882.05 308.52,2879.55
  BottomLayer w10: 308.52,2879.55 343.74,2879.55 446.24,2982.05 742.24,2982.05 785.24,3025.05 2163.02,3025.05 2852.02,3714.05 4079.02,3714.05 4100.02,3693.05 4100.02,966.05 4019.64,885.67 J43.20@3966.73,885.67
LVDS4_8_N: J43.24 J44.L68 | length 7555.6
  BottomLayer w5: J44.L68@115.94,2876.81 169.18,2930.05 226.38,2930.05 239.92,2943.59 259.56,2943.59
  BottomLayer w10: 259.56,2943.59 376.02,3060.05 577.02,3060.05 618.02,3101.05 2135.81,3101.05 2811.81,3777.05 4102.24,3777.05 4150.02,3729.27 4150.02,853.05 3982.64,685.67 J43.24@3966.73,685.67
LVDS4_8_P: J43.23 J44.L34 | length 7506.9
  BottomLayer w5: J44.L34@208.46,2892.56 245.95,2930.05 267.24,2930.05
  BottomLayer w10: 267.24,2930.05 382.24,3045.05 583.24,3045.05 624.24,3086.05 2142.02,3086.05 2818.02,3762.05 4096.02,3762.05 4135.02,3723.05 4135.02,859.27 4002.92,727.17 3949.54,727.17 3908.04,685.67 J43.23@3866.73,685.67
LVDS5_1_N: J44.U35 J45.3 | length 6742.2
  TopLayer w10: J44.U35@546.25,2884.68 520.86,2884.68 507.49,2898.05 507.49,2926.52 716.02,3135.05 4979.81,3135.05 4998.81,3116.05 5215.02,3116.05 5234.1,3135.13 v1(5565.1,3135.13)
  BottomLayer w10: J45.3@5539.96,1685.67 5539.96,1726.99 5581.45,1768.48 5581.45,1787.48 5620.42,1826.45 5616.02,1830.84 5616.02,2703.84 5597.02,2722.84 5597.02,3110.05 5571.95,3135.13 v1(5565.1,3135.13)
LVDS5_1_P: J44.U1 J45.2 | length 6676.2
  TopLayer w5: J44.U1@453.73,2884.68 J44.U1@461.62,2884.68 ; 492.49,2915.55 494.99,2918.05 494.99,2922.2
  TopLayer w10: J44.U1@461.62,2884.68 479.12,2884.68 492.49,2898.05 492.49,2915.55 492.49,2932.74 709.81,3150.05 4986.02,3150.05 5005.02,3131.05 5208.81,3131.05 5227.89,3150.13 5552.04,3150.13 5556.88,3154.97 5580.17,3154.97 v1(5582.55,3152.59)
  BottomLayer w10: v1(5582.55,3152.59) 5582.55,3145.74 5612.02,3116.27 5612.02,2729.05 5631.02,2710.05 5631.02,1837.05 5639.96,1828.12 J45.2@5639.96,1785.67
LVDS5_2_N: J44.U36 J45.6 | length 6814.7
  TopLayer w5: J44.U36@591.53,2853.19 595.39,2857.05 633.02,2857.05 635.52,2854.55
  TopLayer w10: 635.52,2854.55 661.52,2854.55 882.02,3075.05 5737.02,3075.05 5756.02,3056.05 5756.02,1654.17 5685.02,1583.17 5642.46,1583.17 J45.6@5639.96,1585.67
LVDS5_2_P: J44.U2 J45.5 | length 7102.9
  TopLayer w5: J44.U2@499.01,2853.19 512.87,2867.05 528.22,2867.05 535.81,2859.47 562.15,2859.47 581.08,2878.41 601.97,2878.41 613.32,2867.05 633.02,2867.05 635.52,2869.55
  TopLayer w10: 635.52,2869.55 655.31,2869.55 875.81,3090.05 5743.24,3090.05 5771.02,3062.27 5771.02,1647.96 5691.24,1568.17 5681.14,1568.17 5657.14,1544.17 5581.45,1544.17 J45.5@5539.96,1585.67
LVDS5_3_N: J44.U37 J45.9 | length 6680
  TopLayer w5: J44.U37@546.25,2821.69 573.22,2821.69 576.94,2817.97 633.02,2817.97 635.52,2815.47
  TopLayer w10: 635.52,2815.47 688.65,2815.47 912.24,3039.05 5424.02,3039.05 5471.02,2992.05 5471.02,1544 5505.31,1509.71 5498.46,1502.86 5498.46,1468.48 5539.96,1426.99 J45.9@5539.96,1385.67
LVDS5_3_P: J44.U3 J45.8 | length 6801.7
  TopLayer w5: J44.U3@453.73,2821.69 510.59,2821.69 535.81,2846.91 562.15,2846.91 581.08,2827.97 633.02,2827.97 635.52,2830.47
  TopLayer w10: 635.52,2830.47 682.44,2830.47 906.02,3054.05 5430.24,3054.05 5486.02,2998.27 5486.02,1550.21 5515.92,1520.32 5522.77,1527.17 5557.14,1527.17 5598.64,1485.67 J45.8@5639.96,1485.67
LVDS5_4_N: J44.U38 J45.12 | length 6801.9
  TopLayer w5: J44.U38@591.53,2790.2 593.67,2788.05 632.02,2788.05 634.52,2790.55
  TopLayer w10: 634.52,2790.55 717.52,2790.55 938.02,3011.05 5411.24,3011.05 5446.02,2976.27 5446.02,1362.05 5474.02,1334.05 5591.57,1334.05 J45.12@5639.96,1285.67
LVDS5_4_P: J44.U4 J45.11 | length 6808.1
  TopLayer w5: J44.U4@499.01,2790.2 511.15,2778.05 529.94,2778.05 535.81,2783.92 562.15,2783.92 581.08,2764.98 601.97,2764.98 615.05,2778.05 632.02,2778.05 634.52,2775.55
  TopLayer w10: 634.52,2775.55 723.74,2775.55 944.24,2996.05 5405.02,2996.05 5431.02,2970.05 5431.02,1355.84 5467.81,1319.05 5506.57,1319.05 J45.11@5539.96,1285.67
LVDS5_5_N: J44.U39 J45.15 | length 7978
  TopLayer w5: 474.52,2971.55 472.02,2969.05 472.02,2953.05 429.02,2910.05 429.02,2895.64 428.52,2895.13 428.52,2874.24 429.02,2873.73 429.02,2832.65 428.52,2832.14 428.52,2811.25 448.71,2791.05 462.49,2791.05 488.56,2764.98 539.97,2764.98 J44.U39@546.25,2758.7
  TopLayer w10: 474.52,2971.55 474.52,3005.55 639.02,3170.05 5002.81,3170.05 5020.81,3152.05 5188.02,3152.05 5213.02,3177.05 5571.89,3177.05 5572.26,3177.43 5592.84,3177.43 5593.22,3177.05 5767.02,3177.05 5818.02,3126.05 5818.02,1391.27 5653.92,1227.17 5622.77,1227.17 5598.46,1202.86 5598.46,1171.7 5539.96,1113.2 J45.15@5539.96,1085.67
LVDS5_5_P: J44.U5 J45.14 | length 7801.9
  TopLayer w5: J44.U5@453.73,2758.7 419.02,2793.41 419.02,2806.6 418.52,2807.11 418.52,2836.28 419.02,2836.79 419.02,2869.59 418.52,2870.1 418.52,2899.27 419.02,2899.78 419.02,2914.2 462.02,2957.2 462.02,2969.05 459.52,2971.55
  TopLayer w10: 459.52,2971.55 459.52,3011.77 632.81,3185.05 5009.02,3185.05 5027.02,3167.05 5181.81,3167.05 5206.81,3192.05 5565.68,3192.05 5566.05,3192.43 5599.06,3192.43 5599.43,3192.05 5773.24,3192.05 5833.02,3132.27 5833.02,1385.05 5639.96,1191.99 J45.14@5639.96,1185.67
LVDS5_6_N: J44.U40 J45.18 | length 7141.9
  TopLayer w5: J44.U40@591.53,2727.2 599.03,2734.7 632.52,2734.7 635.02,2732.2
  TopLayer w10: 635.02,2732.2 749.39,2732.2 976.24,2959.05 5365.02,2959.05 5389.02,2935.05 5389.02,985.84 5432.81,942.05 5596.34,942.05 J45.18@5639.96,985.67
LVDS5_6_P: J44.U6 J45.17 | length 7148
  TopLayer w5: J44.U6@499.01,2727.2 516.51,2744.7 524.59,2744.7 535.81,2733.48 562.15,2733.48 581.08,2752.42 601.97,2752.42 609.69,2744.7 632.52,2744.7 635.02,2747.2
  TopLayer w10: 635.02,2747.2 743.17,2747.2 970.02,2974.05 5371.24,2974.05 5404.02,2941.27 5404.02,992.05 5439.02,957.05 5511.34,957.05 J45.17@5539.96,985.67
LVDS5_7_N: J44.U41 J45.21 | length 7175.8
  TopLayer w5: J44.U41@546.25,2695.71 547.6,2697.05 571.87,2697.05 576.94,2691.99 606.11,2691.99 611.18,2697.05 631.02,2697.05 633.52,2694.55
  TopLayer w10: 633.52,2694.55 786.74,2694.55 1011.24,2919.05 5330.02,2919.05 5344.02,2905.05 5344.02,860.84 5421.81,783.05 5537.34,783.05 J45.21@5539.96,785.67
LVDS5_7_P: J44.U7 J45.20 | length 7423.4
  TopLayer w5: J44.U7@453.73,2695.71 465.08,2707.05 483.5,2707.05 488.56,2701.99 516.87,2701.99 535.81,2720.93 562.15,2720.93 581.08,2701.99 601.97,2701.99 607.04,2707.05 631.02,2707.05 633.52,2709.55
  TopLayer w10: 633.52,2709.55 780.52,2709.55 1005.02,2934.05 5336.24,2934.05 5359.02,2911.27 5359.02,867.05 5428.02,798.05 5493.66,798.05 5522.77,827.17 5581.45,827.17 J45.20@5639.96,885.67
LVDS5_8_N: J44.U42 J45.24 | length 7268.1
  TopLayer w5: J44.U42@591.53,2664.21 596.53,2659.21 630.02,2659.21 632.52,2661.71
  TopLayer w10: 632.52,2661.71 800.68,2661.71 1035.02,2896.05 5292.24,2896.05 5312.02,2876.27 5312.02,821.05 5398.02,735.05 5590.57,735.05 J45.24@5639.96,685.67
LVDS5_8_P: J44.U8 J45.23 | length 7274.2
  TopLayer w5: J44.U8@499.01,2664.21 514.01,2649.21 527.09,2649.21 535.81,2657.93 562.15,2657.93 581.08,2639 601.97,2639 612.19,2649.21 630.02,2649.21 632.52,2646.71
  TopLayer w10: 632.52,2646.71 806.89,2646.71 1041.24,2881.05 5286.02,2881.05 5297.02,2870.05 5297.02,814.84 5391.81,720.05 5505.57,720.05 J45.23@5539.96,685.67
LVDS6_1_N: J44.U43 J46.3 | length 6839.5
  TopLayer w5: 439.52,2985.55 437.02,2983.05 437.02,2964.05 408.02,2935.05 408.02,2694.31 442.28,2660.05 467.5,2660.05 488.56,2639 539.97,2639 J44.U43@546.25,2632.72
  TopLayer w10: 439.52,2985.55 439.52,3024.55 624.02,3209.05 5111.02,3209.05 5122.02,3198.05 5122.02,3195.05 v1(5120.1,3193.13)
  BottomLayer w10: v1(5120.1,3193.13) 5126.95,3193.13 5140.02,3180.05 5140.02,1868.84 5144.42,1864.45 5085.07,1805.11 5085.07,1768.48 5126.57,1726.99 J46.3@5126.57,1685.67
LVDS6_1_P: J44.U9 J46.2 | length 6696.2
  TopLayer w5: 424.52,2985.55 427.02,2983.05 427.02,2968.2 398.02,2939.2 398.02,2690.17 436.39,2651.8 436.39,2650.05 J44.U9@453.73,2632.72
  TopLayer w10: 424.52,2985.55 424.52,3030.77 617.81,3224.05 5117.24,3224.05 5132.63,3208.66 5135.63,3208.66 v1(5137.55,3210.59)
  BottomLayer w10: v1(5137.55,3210.59) 5137.55,3203.74 5155.02,3186.27 5155.02,1875.05 5226.57,1803.51 J46.2@5226.57,1785.67
LVDS6_2_N: J44.U44 J46.6 | length 6156.3
  TopLayer w5: J44.U44@591.53,2601.22 592.36,2602.05 626.02,2602.05 628.52,2599.55
  TopLayer w10: 628.52,2599.55 841.74,2599.55 1083.24,2841.05 5176.81,2841.05 5202.2,2815.66 5245.63,2815.66 5260.6,2830.63 v1(5267.45,2830.63)
  BottomLayer w10: J46.6@5226.57,1585.67 5247.64,1585.67 5305.42,1643.45 5305.42,1852.87 5204.02,1954.27 5204.02,2774.05 5260.6,2830.63 v1(5267.45,2830.63)
LVDS6_2_P: J44.U10 J46.5 | length 6360
  TopLayer w5: J44.U10@499.01,2601.22 509.84,2612.05 531.25,2612.05 535.81,2607.5 562.15,2607.5 581.08,2626.44 601.97,2626.44 616.35,2612.05 626.02,2612.05 628.52,2614.55
  TopLayer w10: 628.52,2614.55 835.52,2614.55 1077.02,2856.05 5183.02,2856.05 5208.42,2830.66 5239.42,2830.66 5249.99,2841.24 v1(5249.99,2848.09)
  BottomLayer w10: J46.5@5126.57,1585.67 5167.89,1585.67 5209.38,1627.17 5243.76,1627.17 5255.84,1615.08 5290.42,1649.66 5290.42,1846.66 5189.02,1948.05 5189.02,2780.27 5249.99,2841.24 v1(5249.99,2848.09)
LVDS6_3_N: J44.U45 J46.9 | length 6118.6
  TopLayer w5: J44.U45@546.25,2569.72 573.22,2569.72 576.94,2566 606.11,2566 609.84,2569.72 626.02,2569.72 628.52,2567.22
  TopLayer w10: 628.52,2567.22 890.41,2567.22 1129.24,2806.05 5064.02,2806.05 5079.6,2790.48 v1(5079.6,2783.63)
  BottomLayer w10: v1(5079.6,2783.63) 5080.02,2784.05 5086.02,2784.05 5096.02,2774.05 5096.02,1903.27 5046.02,1853.27 5046.02,1555.61 5091.92,1509.71 5085.07,1502.86 5085.07,1468.48 5126.57,1426.99 J46.9@5126.57,1385.67
LVDS6_3_P: J44.U11 J46.8 | length 6240.3
  TopLayer w5: J44.U11@453.73,2569.72 510.59,2569.72 535.81,2594.94 562.15,2594.94 581.08,2576 601.97,2576 605.69,2579.72 626.02,2579.72 628.52,2582.22
  TopLayer w10: 628.52,2582.22 884.19,2582.22 1123.02,2821.05 5070.24,2821.05 5090.21,2801.09 v1(5097.05,2801.09)
  BottomLayer w10: v1(5097.05,2801.09) 5096.63,2800.66 5096.63,2794.66 5111.02,2780.27 5111.02,1897.05 5061.02,1847.05 5061.02,1561.82 5102.53,1520.32 5109.38,1527.17 5143.76,1527.17 5185.25,1485.67 J46.8@5226.57,1485.67